# Altium PCB microPower1.PcbDoc
Units mil, origin at the board's own origin, x right, y up, seen from the top; angles counter-clockwise.
Board outline 1968.5 x 984.25 mil, 2 copper layers (Top Layer, Bottom Layer); 66 components, 48 nets, 240 pads, 41 vias.
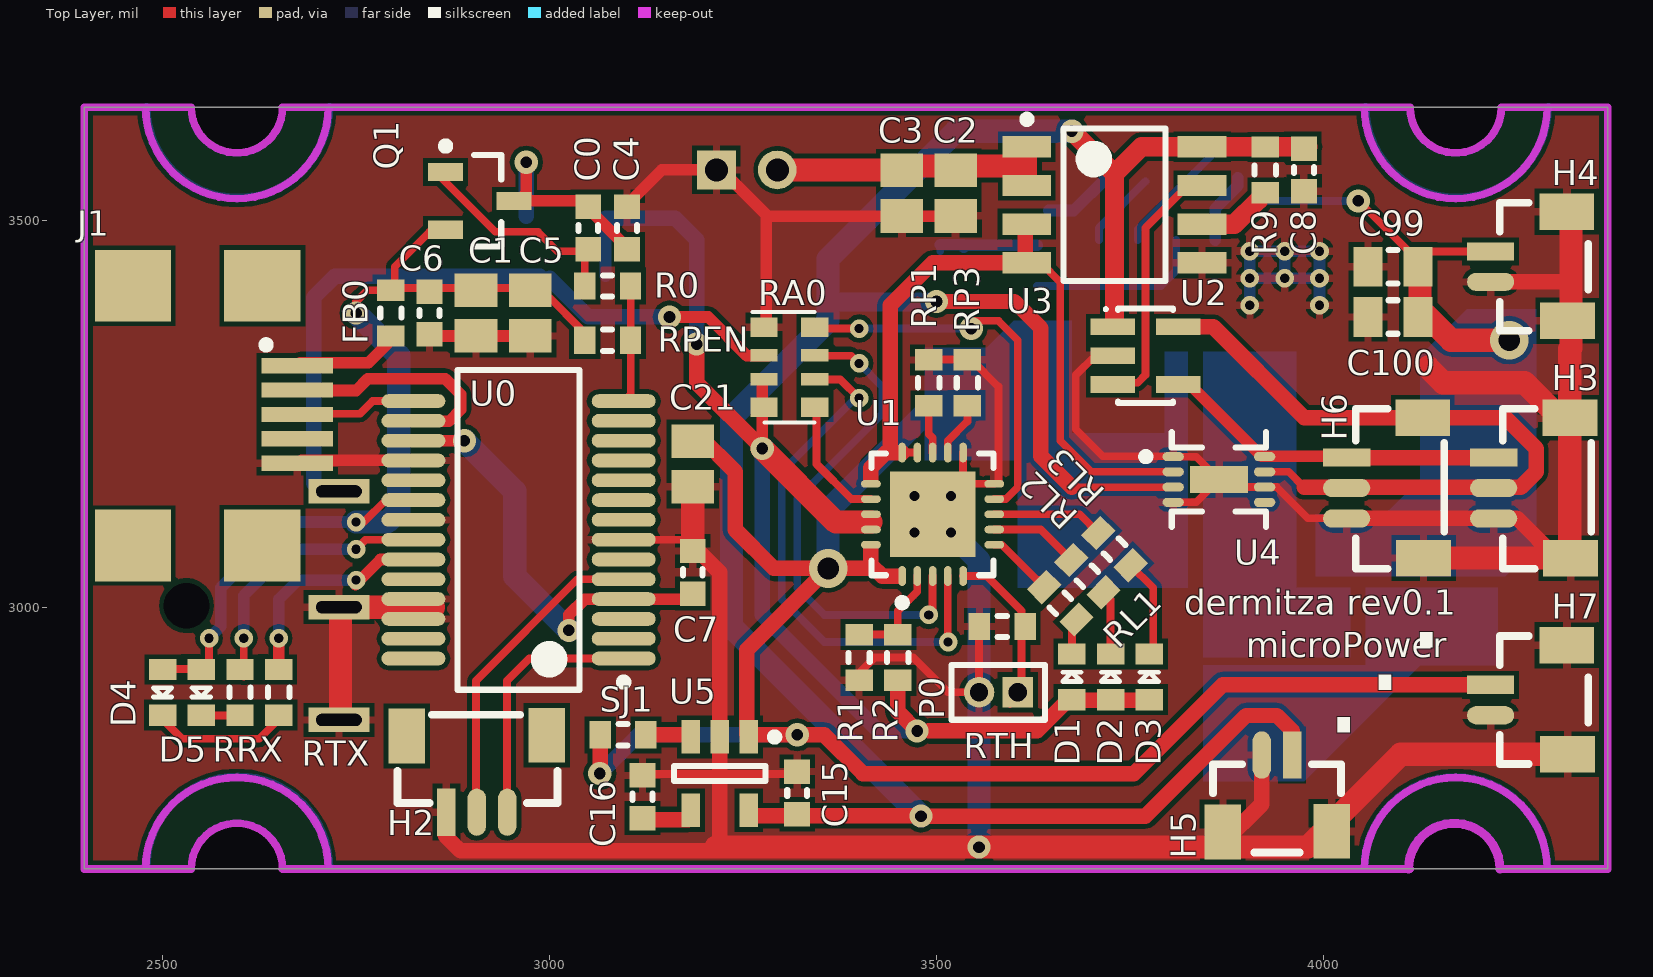
[diagram p0: Top Layer view]
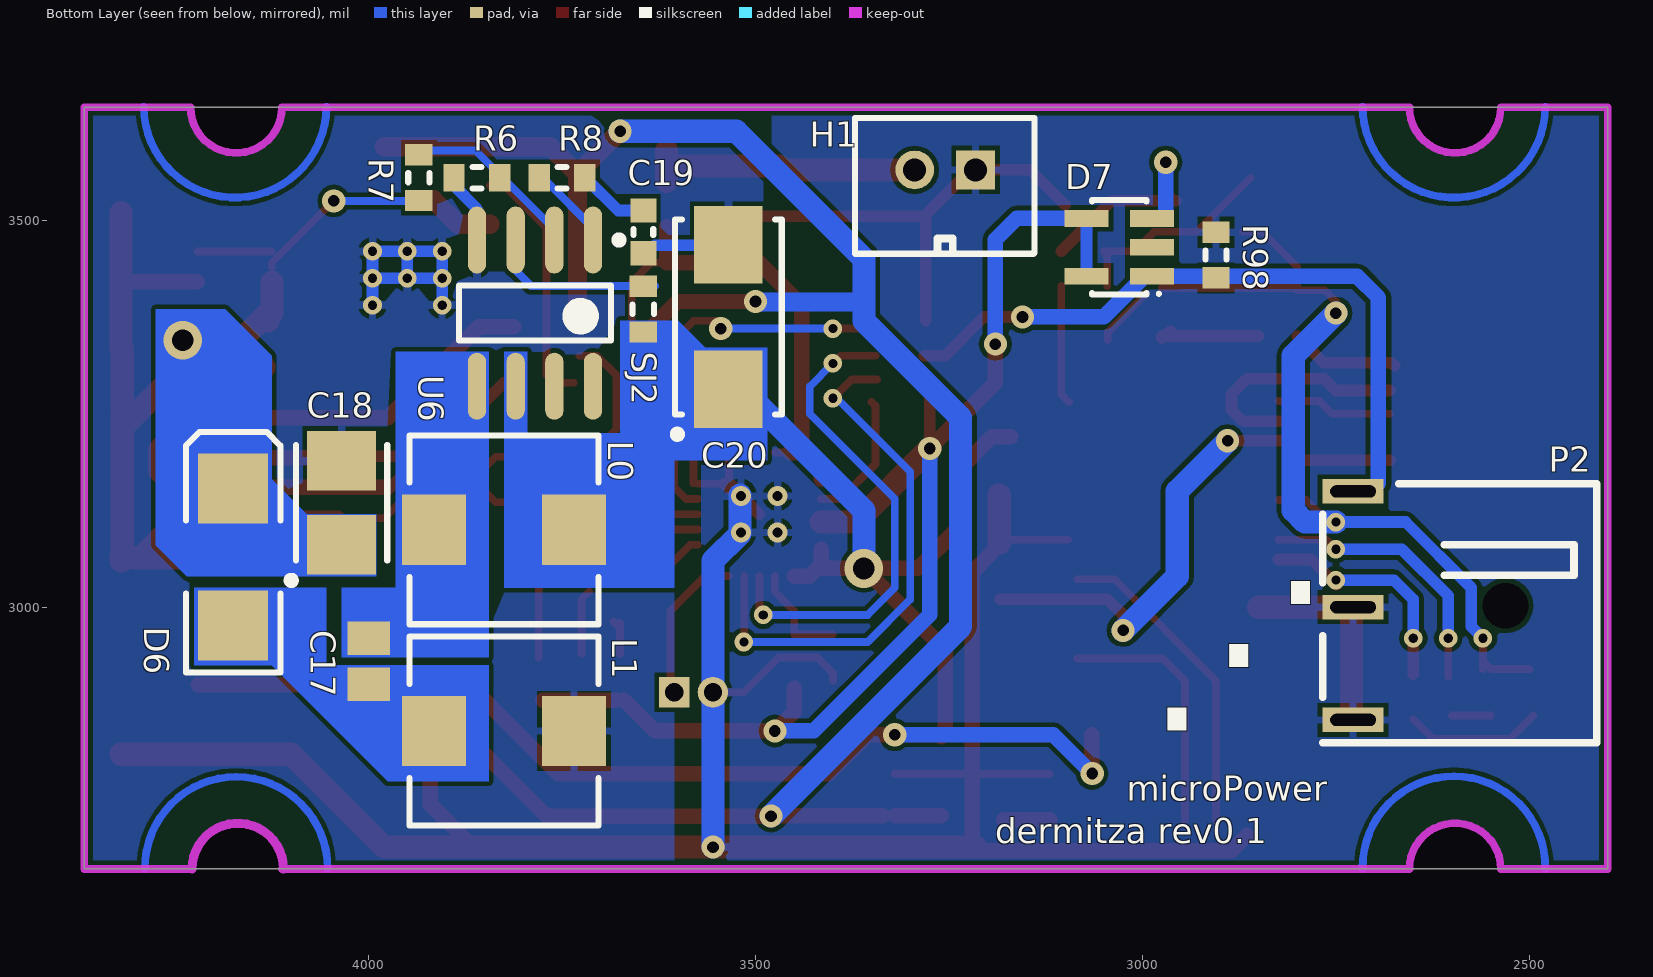
[diagram p1: Bottom Layer view, seen from below]

## Layer stack, top to bottom
Top Layer: signal copper 1.4
Dielectric: dielectric 12.6, FR-4, Dk 4.8
Bottom Layer: signal copper 1.4

## Board outline
2398.83,3646 2398.83,2661.75 4367.34,2661.75 4367.34,3646 2398.83,3646

## Design rules (kind name [scope] priority, off if disabled: settings)
Clearance [All] p1: gap=6
ComponentClearance ComponentClearance1 [OnLayer('Top Layer') vs OnLayer('Top Layer')] p1: gap=3 collisioncheckmode=3 verticalgap=2 showdistances=TRUE
HoleToHoleClearance [All] p1: gap=5 allowstackedmicrovias=TRUE
MinimumSolderMaskSliver [All] p1: minsoldermaskwidth=2
PlaneClearance [All] p1: clearance=100
PlaneConnect [All] p1: planeconnectstyle=Relief reliefexpansion=20 reliefentries=4 reliefconductorwidth=10 reliefairgap=15
PolygonConnect [All] p1: connectstyle=Relief reliefconductorwidth=10 reliefentries=4 polygonreliefangle="90 Angle"
RoutingVias [All] p1: holewidth=28 width=50 viastyle="Through Hole" minholewidth=10 minwidth=20 maxholewidth=28 maxwidth=50
SilkToSilkClearance [All] p1: silktosilkclearance=5
SilkscreenOverComponentPads [All] p1: minsilkscreentomaskgap=1
SolderMaskExpansion [All] p1: expansion=4
Width [All] p1: maxlimit=50 minlimit=10 preferedwidth=10 minimp=50.000000 maximp=50.000000 favimp=50.000000
21 further rules are at their usual default settings.

## Components (designator, comment, footprint, x,y, rotation, side; value= is the part's Value field where it differs from the comment)
C0 "0.1uF" 0603_CAP 3050,3490 r90 top
C1 "4.7uF" 0805_CAP 2905,3380 r270 top
C2 "4.7uF" 0805_CAP 3525,3535 r90 top
C3 "10uF" 0805_CAP 3455,3535 r90 top
C4 "0.1uF" 0603_CAP 3100,3490 r270 top
C5 "10uF" 0805_CAP 2975,3380 r270 top
C6 "0.01uF" 0603_CAP 2845,3380 r270 top
C7 "0.1uF" 0603_CAP 3185,3045 r270 top
C8 "0.1uF" 0603_CAP 3975,3565 r90 top
C15 "2.2uF" 0603_CAP 3320,2760 r90 top
C16 "470pF" 0603_CAP 3120,2755 r90 top
C17 "4.7uF" 0805_CAP 4000,2930 r270 bottom
C18 "220uF" CAPMP3528X21N 4035,3135 r90 bottom
C19 "680pF" 0603_CAP 3645,3485 r270 bottom
C20 "47uF" CAPMP6032X28N 3535,3375 r90 bottom
C21 "4.7uF" 0805_CAP 3185,3185 r270 top
C99 "CAP_0805" CAP_0805 4090,3440 r0 top
C100 "CAP_0805" CAP_0805 4090,3375 r0 top
D1 "" 0603_LED 3675,2910 r90 top
D2 "" 0603_LED 3725,2910 r90 top
D3 "" 0603_LED 3775,2910 r90 top
D4 "" 0603_LED 2500,2890 r270 top
D5 "" 0603_LED 2550,2890 r270 top
D6 "D Schottky" SMB 4175,3065 r90 bottom
D7 "RB496EA" SOT23-5 3030,3465 r90 bottom
FB0 "FB_SMD" 0603_IND 2795,3380 r90 top
H1 "JST2, through-hole" "JST B2B-PH-KL" 3255,3565 r0 bottom
H2 "RS232" "JST SHR-3V-S" 2905,2800 r0 top
H3 "I2C" "JST SHR-3V-S" 4285,3155 r270 top
H4 "V5" "JST SHR-2V-S" 4285,3440 r270 top
H5 "JST2, SMA" "JST SHR-2V-S" 3940,2740 r180 top
H6 "I2C" "JST SHR-3V-S" 4095,3155 r270 top
H7 "JST2, SMA" "JST SHR-2V-S" 4285,2880 r270 top
J1 "0481900001" 481900001 2525,3250 r180 top
L0 "10uH" INDP6060X45L 3825,3100 r0 bottom
L1 "10uH" INDP6060X45L 3825,2840 r180 bottom
P0 "MHDR1X2" MHDR1X2 3605,2890 r180 top
P2 "PJ-014D" PJ-014D 2590,3000 r270 bottom
Q1 "IRLML6402" Micro3_N 2910,3525 r0 top
R0 "1k" 0603_RES 3075,3415 r180 top
R1 "110k" 0603_RES 3400,2935 r90 top
R2 "330k" 0603_RES 3450,2935 r90 top
R6 "100K" 0603_RES 3860,3555 r180 bottom
R7 "309K" 0603_RES 3935,3555 r90 bottom
R8 "47K" 0603_RES 3750,3555 r180 bottom
R9 "10K" 0603_RES 3925,3565 r90 top
R98 "1M" 0603_RES 2905,3455 r90 bottom
RA0 "100k" RESCAXS80P320X150X60-8N 3310,3310 r270 top
RL1 "470R" 0603_RES 3660,3005 r135 top
RL2 "470R" 0603_RES 3695,3040 r135 top
RL3 "470R" 0603_RES 3730,3075 r135 top
RP1 "2K" 0603_RES 3490,3290 r90 top
RP3 "100K" 0603_RES 3540,3290 r90 top
RPEN "10k" 0603_RES 3075,3345 r0 top
RRX "270R" 0603_RES 2600,2890 r90 top
RTH "10K" 0603_RES 3585,2975 r0 top
RTX "270R" 0603_RES 2650,2890 r90 top
SJ1 "SJ" 0603_SJ 3095,2835 r0 top
SJ2 "SJ" 0603_SJ 3645,3385 r90 bottom
U0 "FT232R" SOP65P780X200-28N 2960,3100 r180 top
U1 "MCP73871-2CCI/ML" MCP73871-2CCI/ML 3495,3120 r90 top
U2 "MCP3021" SOT23-5 3770,3325 r270 top
U3 "ACS711" SOP127P600X175-8M 3730,3520 r0 top
U4 "MAX17043" QFN50P300X200X80-8N 3865,3165 r0 top
U5 "MIC5205-3.3BM5" SOT95P280X130-5N 3220,2785 r270 top
U6 "LT1308A" SOP127P600X175-8N 3785,3380 r270 bottom

## Footprints (in the part's own frame and the unit in brackets; to place one, negate y for a bottom-side part, rotate by r counter-clockwise, add the part's x,y. Pads: shape width x height; smd on the part's side, far side on the other; paste and mask are expansions set on the pad)
0603_CAP [mm] "Chip Capacitor, 2-Leads, Body 1.6x0.8mm, IPC High Density"
  rect 0.8x0.85 smd: 1(-0.7,0) 2(0.7,0)
  silkscreen extent -0.1,-0.33 0.1,0.33, body extent -0.88,-0.48 0.87,0.48, height 0.85
0603_IND [mm] "Chip Inductor, 2-Leads, Body 1.6x0.8mm, IPC High Density"
  rect 0.7x0.9 smd: 1(-0.75,0) 2(0.75,0)
  silkscreen extent -0.15,-0.35 0.15,0.35, body extent -0.85,-0.48 0.85,0.48, height 0.6
0603_LED [mm] "Chip LED, 2-Leads, Body 1.6x0.8mm, IPC High Density"
  rect 0.7x0.9 smd: 1(-0.75,0) 2(0.75,0)
  silkscreen extent -0.15,-0.3 0.15,0.3, body extent -0.85,-0.48 0.85,0.48, height 0.6
0603_RES [mm] "Chip Resistor, 2-Leads, Body 1.6x0.8mm, IPC High Density"
  rect 0.7x0.9 smd: 1(-0.75,0) 2(0.75,0)
  silkscreen extent -0.15,-0.35 0.15,0.35, body extent -0.85,-0.48 0.85,0.48, height 0.6
0603_SJ [mm] "Solder Joint, 2-Leads, Body 1.6x0.8mm, IPC High Density"
  rect 0.7x0.9 smd: 1(-0.75,0) 2(0.75,0)
  silkscreen extent -0.15,-0.35 0.15,0.35
0805_CAP [mm] "Chip Capacitor, 2-Leads, Body 2.0x1.3mm, IPC High Density"
  rect 1.1x1.4 smd: 1(-0.75,0) 2(0.75,0)
  body extent -1.1,-0.72 1.1,0.73, height 1.1
481900001 [mm] "Connector; USB Mini-B, Sinking Type, SM; 5 Position; Right Angle"
  rect 2.35x0.5 smd: 1(-3.787,-1.575) 2(-3.787,-0.775) 3(-3.787,0.025) 4(-3.787,0.825) 5(-3.787,1.625)
  rect 2.5x2.35 smd: MH1(-2.638,-4.2) MH2(1.613,-4.2) MH3(1.613,4.325) MH4(-2.638,4.325)
  silkscreen extent -2.89,-2.39 -2.64,-2.14, body extent -4.05,-3.81 4.55,3.89, height 4
CAP_0805 [mm] "CAP_0805"
  rect 0.95x1.3 smd: 1(-0.825,0) 2(0.825,0)
  silkscreen extent -0.15,-0.55 0.15,0.55, body extent -1.07,-0.7 1.07,0.7, height 0.65
CAPMP3528X21N [mm] "Molded Capacitor, 2-Leads, Body 3.5x2.8mm, IPC Medium Density"
  rect 1.95x2.25 smd: 1(-1.375,0) 2(1.375,0)
  silkscreen extent -2.67,-1.5 1.9,1.78, body extent -1.85,-1.5 1.85,1.5, height 2.1
CAPMP6032X28N [mm] "Molded Capacitor, 2-Leads, Body 6.0x3.2mm, IPC Medium Density"
  rect 2.55x2.25 smd: 1(-2.375,0) 2(2.375,0)
  silkscreen extent -3.97,-1.75 3.2,1.8, body extent -3.15,-1.75 3.15,1.75, height 2.8
INDP6060X45L [mm] "Precision Wire Wound Inductor, 2-Leads, Body 6.0x6.0mm, IPC High Density"
  rect 2.1x2.3 smd: 1(-2.3,0) 2(2.3,0)
  silkscreen extent -3.1,-3.1 3.1,3.1, body extent -3.1,-3.1 3.1,3.1, height 4.5
"JST B2B-PH-KL" [mm] "JST PH series, top entry, 2mm, 2A, Through-hole"
  rect 1.27x1.27 hole 0.75: 1(-1,0)
  round 1.27 hole 0.75: 2(1,0)
  silkscreen extent -2.93,-1.7 2.96,2.75, body extent -2.95,-1.7 2.95,2.75, height 6
"JST SHR-2V-S" [mm] "JST SH series, top entry, 1mm, 1A, SMT"
  rect 0.6x1.55 smd: 1(-0.5,-1.75)
  oval 0.6x1.55 smd: 2(0.5,-1.75)
  rect 1.2x1.8 smd: M1(-1.8,0.75) M2(1.775,0.775)
  silkscreen extent -2.1,-1.45 2.1,1.45, body extent -2.1,-1.45 2.1,1.45, height 6
"JST SHR-3V-S" [mm]
  rect 0.6x1.55 smd: 1(-0.975,-1.65)
  oval 0.6x1.55 smd: 2(0.025,-1.65) 3(1.025,-1.65)
  rect 1.2x1.8 smd: M1(-2.275,0.85) M2(2.325,0.875)
  silkscreen extent -2.58,-1.35 2.67,1.55
MCP73871-2CCI/ML [mm] "QFN, 20-Leads, Body 4.0x4.0mm (max), Pitch 0.50mm, IPC Medium Density"
  oval 0.65x0.25 smd: 1(-2.025,1) 2(-2.025,0.5) 3(-2.025,0) 4(-2.025,-0.5) 5(-2.025,-1) 11(2.025,-1) 12(2.025,-0.5) 13(2.025,0) 14(2.025,0.5) 15(2.025,1)
  oval 0.25x0.65 smd: 6(-1,-2.025) 7(-0.5,-2.025) 8(0,-2.025) 9(0.5,-2.025) 10(1,-2.025) 16(1,2.025) 17(0.5,2.025) 18(0,2.025) 19(-0.5,2.025) 20(-1,2.025)
  rect 2.8x2.8 smd: 21(0,0)
  silkscreen extent -3.02,-2 2,2, body extent -2,-2 2,2, height 1
MHDR1X2 [mm] "Connector; Header; 2 Position"
  rect 1x1 hole 0.6: 1(0,0)
  round 1 hole 0.6: 2(1.27,0)
  silkscreen extent -0.9,-0.9 2.17,0.9
Micro3_N [mm] "SOT23, 3-Leads, Body 2.9x1.3mm, Pitch 0.95mm, Lead Span 2.3mm, IPC Medium Density"
  rect 1.15x0.6 smd: 1(-1.125,0.95) 2(-1.125,-0.95) 3(1.125,0)
  silkscreen extent -1.25,-1.5 0.7,1.92, body extent -0.7,-1.5 0.7,1.5, height 1.12
PJ-014D [mm] "Power jack, 4.2mm OD, 1.3mm ID, through-hole"
  rect 0.8x2 hole 0.4 slot 1.5 at 90 deg: 1(-3.8,-3.5) 2(3.7,-3.5) 3(0,-3.5)
  round 0 hole 1.5: 4(-0.05,1.5)
  silkscreen extent -4.05,-4.5 4.45,4.5, body extent -4.05,-4.5 4.45,4.5, height 5.25
QFN50P300X200X80-8N [mm] "QFN, 8-Leads, Body 2.0x3.0mm (max), Pitch 0.50mm, IPC Medium Density"
  oval 0.7x0.3 smd: 1(-1.5,0.75) 2(-1.5,0.25) 3(-1.5,-0.25) 4(-1.5,-0.75) 5(1.5,-0.75) 6(1.5,-0.25) 7(1.5,0.25) 8(1.5,0.75)
  rect 1.9x0.9 smd: 9(0,0)
  silkscreen extent -2.52,-1.55 1.55,1.55, body extent -1.53,-1.02 1.53,1.03, height 0.8
RESCAXS80P320X150X60-8N [mm] "Resistor Network, 4 Way, 1206"
  rect 0.64x0.9 smd: 1(-1.315,-0.835) 4(1.315,-0.835) 5(1.315,0.835) 8(-1.315,0.835)
  rect 0.41x0.9 smd: 2(-0.4,-0.835) 3(0.4,-0.835) 6(0.4,0.835) 7(-0.4,0.835)
  silkscreen extent -1.82,-1.22 1.82,0.83, body extent -1.7,-0.8 1.7,0.8, height 0.5
SMB [mm] "DO-214-AA/SMB; 2 C-Bend Leads; Body 5.3 x 3.6 mm, inc. leads (LxW)"
  rect 2.3x2.3 smd: 1(-2.25,0) 2(2.25,0)
  silkscreen extent -3.8,-1.55 4.1,1.55
SOP65P780X200-28N [mm] "SOP, 28-Leads, Body 10.5x5.6mm (max), Pitch 0.65mm, IPC Medium Density"
  oval 2.1x0.45 smd: 1(-3.45,4.225) 2(-3.45,3.575) 3(-3.45,2.925) 4(-3.45,2.275) 5(-3.45,1.625) 6(-3.45,0.975) 7(-3.45,0.325) 8(-3.45,-0.325) 9(-3.45,-0.975) 10(-3.45,-1.625) 11(-3.45,-2.275) 12(-3.45,-2.925) 13(-3.45,-3.575) 14(-3.45,-4.225) 15(3.45,-4.225) 16(3.45,-3.575) 17(3.45,-2.925) 18(3.45,-2.275) 19(3.45,-1.625) 20(3.45,-0.975) 21(3.45,-0.325) 22(3.45,0.325) 23(3.45,0.975) 24(3.45,1.625) 25(3.45,2.275) 26(3.45,2.925) 27(3.45,3.575) 28(3.45,4.225)
  silkscreen extent -3.57,-5.25 2,5.25, body extent -2.8,-5.25 2.8,5.25, height 2
SOP127P600X175-8M [mm] "SOP, 8-Leads, Body 5.0x4.0mm (max), Pitch 1.27mm, IPC Low Density"
  rect 1.6x0.7 smd: 1(-2.875,1.905) 2(-2.875,0.635) 3(-2.875,-0.635) 4(-2.875,-1.905) 5(2.875,-1.905) 6(2.875,-0.635) 7(2.875,0.635) 8(2.875,1.905)
  silkscreen extent -3,-2.5 1.68,2.93, body extent -2,-2.5 2,2.5, height 1.75
SOP127P600X175-8N [mm] "SOP, 8-Leads, Body 5.0x4.0mm (max), Pitch 1.27mm, IPC Medium Density"
  oval 2.2x0.6 smd: 1(-2.4,1.905) 2(-2.4,0.635) 3(-2.4,-0.635) 4(-2.4,-1.905) 5(2.4,-1.905) 6(2.4,-0.635) 7(2.4,0.635) 8(2.4,1.905)
  silkscreen extent -2.52,-2.5 0.9,2.88, body extent -1.99,-2.5 1.99,2.5, height 1.75
SOT23-5 [mm] "SOT23-5"
  rect 0.55x1.45 smd: 1(-0.95,-1.075) 2(0,-1.075) 3(0.95,-1.075) 4(0.95,1.075) 5(-0.95,1.075)
  silkscreen extent -1.57,-1.35 1.55,0.9
SOT95P280X130-5N [mm] "SOT23, 5-Leads, Body 3.0x3.0mm (max), Pitch 0.95mm, IPC Medium Density"
  rect 1.1x0.6 smd: 1(-1.2,0.95) 2(-1.2,0) 3(-1.2,-0.95) 4(1.2,-0.95) 5(1.2,0.95)
  silkscreen extent -1.32,-1.5 0.25,1.93, body extent -0.87,-1.51 0.87,1.51, height 1.3

## Part data
C0 C4 C6 C7 C8 C15 C16 C19: library part CAP_0603, "CAP_0603"
C1 C2 C3 C5 C17 C21: library part CAP_SMD, "Chip Capacitor"
C18: library part T520B227M006ATE070, "CAP TANT 220UF 6.3V 20% 1411"
C20: library part TR3C476K016C0300, "CAP TANT 47UF 16V 10% 2312"
D1 D2 D3 D4 D5: library part LED_SMD
D6: "Schottky Diode"
D7: "Schottky barrier diode, 400mV @ 1A"
H2 H3 H6: library part JST3
H4: library part JST2
J1: "USB On-The-Go (OTG) Mini-B Receptacle, Right Angle, SMT, 0.80mm (.031\") Pitch, Solder Tabs with Back Cover, Recessed Type"
L0 L1: library part NR6045T100M, "INDUCTOR 10UH 3A 20% SMD"
P0: "Header, 2-Pin"
P2: "Power jack, 4.2mm OD, 1.3mm ID, through-hole"
Q1: library part IRLML6401, "HEXFET Power MOSFET"
R0 R1 R2 R6 R7 R8 R9 R98 RL1 RL2 RL3 RP1 RP3 RPEN RRX RTH RTX: library part RES_SMD
RA0: library part RES_ARR4, "Resistor array, 4-Way, SMD"
SJ1 SJ2: "Solder Joint"
U4: "Compact, Low-Cost 1S/2S Fuel Gauges with Low-Battery Alert"
U5: library part MIC5205, "Micrel MIC5205 LDO Voltage Regulator"
U6: library part LT1308, "High Current, Micropower Single Cell, 600kHz  DC/DC Converters"

## Free pads (board coordinates)
  round 0 hole 118.11: 0(2595,2660) 0(2595,3645) 0(4170,2660) 0(4170,3645)

## Via types
v1: diameter 24, hole 12, Top Layer to Bottom Layer, 19 vias
v2: diameter 30, hole 15, Top Layer to Bottom Layer, 16 vias
v3: diameter 25.98, hole 12.99, Top Layer to Bottom Layer, tented top, 4 vias
v4: diameter 50, hole 28, Top Layer to Bottom Layer, 2 vias

## Nets (pads, with @x,y where several pads share a name; then routed paths per layer and width w, separated by ;. In a path a pad name is that pad's centre, name@x,y a point inside that pad or via, vN(x,y) a via of type N, cw(c..) or ccw(c..) an arc to the next point about the centre after c; other vN are vias at no path point)
CE: RA0.5 U1.17 | length 171.1
  Top Layer w10: RA0.5@3350,3265 3345,3260 3345,3185 3390.31,3139.69 U1.17
D+: J1.3 U0.15 | length 150.9
  Top Layer w10: J1.3@2680,3250 2755,3250 2771.34,3266.34 U0.15
D-: J1.2 U0.16 | length 315.7
  Top Layer w15: J1.2@2680,3280 2750,3280 2765,3295 2865,3295 2885,3275 2885,3255 2870,3240 U0.16@2815,3240
EN3.3: SJ1.2 U5.3 | length 55.5
  Top Layer w20: SJ1.2 U5.3@3180,2835
GND: C1.2 C2.1 C3.1 C4.1 C5.2 C6.2 C7.1 C8.1 C15.2 C16.2 C18.2 C19.2 C20.2 C21.2 C99.1 C100.1 H1.1 H2.1 H3.3 H3.M1 H3.M2 H4.2 H4.M1 H4.M2 H5.2 H5.M1 H5.M2 H6.3 H6.M2 H7.2 H7.M1 H7.M2 J1.5 L1.2 P0.2 P2.2 P2.3 R1.1 R6.1 R98.2 RA0.1 RP1.2 RP3.2 RTH.1 U0.7 U0.18 U0.21 U0.25 U0.26 U1.10 U1.11 U1.21 U2.2 U3.5 U4.1 U4.4 U4.6 U4.9 U5.2 U6.4 | length 7117
  Top Layer w10: U0.7 3167.8,3087.2 ; C16.2@3120,2784.53 3220,2784.53 3319.53,2784.53 C15.2@3320,2785 ; R1.1@3400,2905 3400,2915 3420,2935 3470,2935 3515,2890 P0.2@3550,2890 ; RP1.2@3490,3320 3545,3320 3580,3285 U1.10@3580,3160 ; U1.21@3534.37,3160.63 U1.11 ; U1.21@3540.63,3159.37 U1.10 ; P0.2 RTH.1@3555,2975 ; U2.2 3705,3325 3680,3300 3680,3230 3715,3195 U4.1@3810,3195 ; U4.4 3835.47,3135.47 U4.9 3835.47,3194.53 U4.1 ; U4.9@3890,3155 3890.16,3155.16 U4.6 3939.84,3155.16 3980,3115 H6.3@4030,3115 ; H3.M2@4301.55,3063.45 4315.51,3063.45 4315.55,3063.85 4316.4,3071.99 H3.M2@4316.55,3073.45 ; 4318.46,3333.46 4320,3335 ; H3.M2@4316.55,3073.45 H3.M2@4318.45,3073.45 ; H3.M2@4316.55,3073.45 4315.51,3074.49 H3.M2 4320,3075 H3.M2@4318.46,3073.46 ; H3.M2@4316.55,3073.45 4318.46,3071.54 H3.M2@4318.46,3073.46
  Top Layer w15: J1.5@2680,3190 U0.18@2810,3190 ; P2.3@2722.8,2997.2 P2.3@2725.59,3000 ; C6.2@2850,3350.47 C5.2@2969.53,3350.47 ; C5.2@2970,3350 C5.2@2969.53,3350.47 ; C5.2@2975,3347.52 2963.46,3356.54 C5.2@2969.53,3350.47 ; C5.2@2975,3350 2974.53,3350.47 C5.2@2969.53,3350.47 ; C4.1@3100,3520 3145,3565 H1.1 H1.1@3220,3565 ; H1.1@3225,3562.13 3282.13,3505 C2.1@3520,3505 ; RA0.1@3280,3370 3280,3503.23 ; U1.21@3534.37,3160.63 U1.21 U1.21@3540.63,3159.37
  Top Layer w20: H2.1@2865,2705 2885,2685 3250,2685 ; C7.1@3196.54,3068.46 3220,3045 3220,2784.53 3220,2690 ; H5.M2@3870,2695 3920.32,2745.32 H5.2 ; H6.3@4039.69,3115 4250,3115 H3.M2@4301.55,3063.45 ; H4.2@4221.1,3420.32 4319.69,3420.32
  Top Layer w30: P2.3@2725.59,3000 2850,3000 ; P2.2@2730,2855 P2.3@2730,2997.87 ; C7.1@3185,3082.4 C21.2@3185,3145 ; 3215,2690 3980,2690 4100,2810 H7.M2@4320,2810 ; H6.M2 H3.M2@4301.55,3063.45 ; 4135,3310 4155,3290 4260,3290 H3.M1@4315,3235 ; H3.M2@4315.51,3063.45 4318.45,3063.45 H3.M2@4320,3065 ; H3.M2@4318.46,3073.46 H3.M1 ; H3.M1@4318.46,3254.57 4318.46,3333.46 ; H3.M2@4319.53,3059.53 H3.M2@4320,3060 ; 4320,3335 H4.M1@4320,3510
  Bottom Layer w10: C20.2@3505,3460 C20.2@3505,3468.5
  Bottom Layer w15: C20.2@3505,3468.5 C20.2 ; C20.2@3535,3465 3537.44,3467.44 C19.2@3630,3467.44 ; U6.4 3860,3515 3889.53,3544.53 R6.1 ; v1(3905,3390) v1(3905,3425) ; v1(3995,3390) v1(3995,3425) ; v1(3905,3425) v1(3950,3425) ; v1(3905,3425) v1(3905,3460) v1(3950,3460) ; v1(3950,3425) v1(3995,3425) ; v1(3950,3425) v1(3950,3460) ; v1(3950,3460) v1(3995,3460) v1(3995,3425)
  Bottom Layer w30: v3@3520,3145 3520,3095 3555,3060 v2(3555,2690)
  other v3: 3471.38,3096.38 3518.62,3096.38 3471.38,3143.62 3518.62,3143.62
NetC0_1: C0.1 Q1.1 R0.2 | length 276.4
  Top Layer w10: Q1.1@2860,3555 2930,3485 2985,3485 3010,3460 C0.1@3050,3460 ; R0.2 3045.47,3454.53 C0.1@3050,3460.47
NetC7_2: C7.2 U0.4 U0.17 | length 565.2
  Top Layer w10: U0.4@3083.66,3010 U0.4@3084.09,3010.43
  Top Layer w15: U0.17@2812.44,3215.16 U0.17 v2@2888.11,3215.16 ; v2(3025,2970) 3025,2990 3045.43,3010.43 3084.09,3010.43 U0.4 C7.2@3184.57,3010.43
  Bottom Layer w30: v2(2890,3215) 2955,3150 2955,3040 v2(3025,2970)
NetC16_1: C16.1 U5.4 | length 59.5
  Top Layer w20: C16.1@3120,2725.47 U5.4@3179.53,2725.47
NetC17_1: C17.1 L0.2 U6.5
NetC17_2: C17.2 D6.1 L1.1
NetC19_1: C19.1 R8.2 | length 92.6
  Bottom Layer w15: C19.1 3677.56,3512.56 R8.2@3720,3555
NetD1_2: D1.2 RL1.1 | length 45.7
  Top Layer w10: D1.2 RL1.1@3675,2980 ; RL1.1@3680,2977.67 RL1.1@3683.66,2981.34
NetD2_2: D2.2 RL2.1 | length 84.1
  Top Layer w10: RL2.1@3715,3020 3725,3010 D2.2@3725,2940
NetD3_2: D3.2 RL3.1 | length 132.4
  Top Layer w10: RL3.1@3750,3055 3780,3025 D3.2@3780,2935
NetD4_2: D4.2 RTX.1 | length 177.8
  Top Layer w10: D4.2@2495,2860 2525,2830 2625,2830 RTX.1@2650,2855
NetD5_2: D5.2 RRX.1 | length 50
  Top Layer w10: D5.2@2550,2860 RRX.1@2600,2860
NetFB0_1: FB0.1 J1.1 | length 141.6
  Top Layer w15: J1.1 2678.09,3316 2766,3316 FB0.1@2800,3350
NetP0_1: P0.1 RTH.2 U1.5 | length 220.6
  Top Layer w10: U1.5 3564.72,3040.28 3610,2995 3610,2890 P0.1@3595,2875
NetR1_2: R1.2 R2.2 U1.2 | length 135.3
  Top Layer w10: R1.2@3400.47,2964.53 R2.2 ; R2.2@3450,2965 3450,2994.95 3470.28,3015.23 ; 3470.28,3015.28 3475.32,3020.32 U1.2
NetR6_2: R6.2 R7.2 U6.2 | length 225.9
  Bottom Layer w10: U6.2 3760,3488.24 3861.76,3590 R7.2@3930,3590
NetR8_1: R8.1 U6.1 | length 100.4
  Bottom Layer w10: U6.1 3710,3490 R8.1@3770,3550
NetR9_1: R9.1 U3.6 | length 86.4
  Top Layer w25: U3.6 3885,3495 R9.1@3916.54,3526.54
NetRL1_2: RL1.2 U1.6 | length 87.1
  Top Layer w10: U1.6 3584.37,3080.63 3629.6,3035.4 RL1.2@3643.07,3035.4
NetRL2_2: RL2.2 U1.7 | length 114.7
  Top Layer w10: U1.7 3634.68,3100.32 3666.34,3068.66 RL2.2@3676.34,3068.66
NetRL3_2: RL3.2 U1.8 | length 145.6
  Top Layer w10: U1.8 3685,3120 RL3.2@3710,3095
NetRP1_1: RP1.1 U1.13 | length 60.5
  Top Layer w10: RP1.1@3485,3256.54 3490,3251.54 3490,3223.79 3495.23,3218.56 3495.23,3209.87 U1.13@3495,3209.65 ; U1.13 U1.13@3495,3209.02
NetRP3_1: RP3.1 U1.12 | length 70.8
  Top Layer w10: U1.12 3514.69,3214.69 3540,3240 RP3.1@3540,3260
NetRRX_2: RRX.2 U0.22 | length 358.2
  Top Layer w10: RRX.2@2605,2910 2605,2955 v1@2610,2960 ; v1(2750,3075) 2762.2,3087.2 U0.22
  Bottom Layer w10: v1@2605,2965 v1@2610,2960
  Bottom Layer w15: v1@2605,2965 2605,3015 2665,3075 v1(2750,3075)
  other v1: 2605,2960
NetRTX_2: RTX.2 U0.23 | length 295.2
  Top Layer w15: RTX.2@2650,2913.46 v1(2650,2960) ; v1@2749.25,3029.25 2781.61,3061.61 U0.23
  Bottom Layer w15: v1(2650,2960) 2650,3010 2675,3035 v1(2750,3035)
NetSJ2_2: SJ2.2 U6.3 | length 227.8
  Bottom Layer w10: SJ2.2@3630,3415 3790,3415 3810,3435 U6.3
NetU2_3: U2.3 U3.7 | length 325.1
  Top Layer w10: U2.3@3735,3290 3760,3290 3770,3300 3770,3490 3825,3545 U3.7
PROG2: RA0.6 U1.4 | length 694.6
  Top Layer w10: RA0.6 3375.75,3294.25 v1(3400,3270) ; v1@3514.69,2955 U1.4
  Bottom Layer w10: v1(3400,3270) 3395,3270 3300,3175 3300,3010 3355,2955 v1(3515,2955)
PWREN#: R0.1 RPEN.2 U0.14 | length 154.1
  Top Layer w10: U0.14@3095,3265 3105,3275 R0.1@3105,3415
RXD: H2.2 U0.5 | length 413.3
  Top Layer w10: H2.2@2905,2725.04 2905,2905 3036.02,3036.02 U0.5@3084.09,3036.02
SCL: H3.2 H6.2 H6.M1 U2.5 U4.7 | length 916.5
  Top Layer w10: U4.7@3920,3175 3955,3175 3975,3155 ; H6.M1@4125,3245 H6.M1@4130,3240
  Top Layer w20: U2.5 3857.6,3362.4 3975,3245 H6.M1@4125,3245 ; 3975,3155 H3.2@4210,3155 ; H6.M1@4130,3245 4235,3245 4275,3205 4275,3175 4255,3155 H3.2@4225,3155
SDA: H3.1 H6.1 U2.4 U4.8 | length 455.7
  Top Layer w10: H3.1@4218.39,3193.39 H3.1@4220,3195
  Top Layer w15: U2.4@3805,3290 3825,3290 3920,3195 4028.43,3195 H6.1
  Top Layer w20: H6.1 H3.1@4218.39,3193.39
SEL: RA0.7 U1.3 | length 644
  Top Layer w10: RA0.7@3345,3325 3390,3325 v1(3400,3315) ; v1(3490,2990) 3495,2995 U1.3
  Bottom Layer w10: v1(3400,3315) 3430,3285 3430,3250 3320,3140 3320,3025 3355,2990 v1(3490,2990)
TE: RA0.8 U1.9 | length 496.3
  Top Layer w10: RA0.8@3345,3360 v1(3400,3360) ; v2@3545.63,3370 3580,3370 3605,3345 3605,3155 3589.69,3139.69 U1.9
  Bottom Layer w10: v1(3400,3360) v2(3545,3360)
TXD: H2.3 U0.1 | length 330.9
  Top Layer w10: H2.3@2945,2725.04 2945,2905 2973.66,2933.66 U0.1@3084.09,2933.66
V3.3: C8.2 C15.1 H5.1 R9.2 U2.1 U3.8 U4.3 U5.5 | length 3227.5
  Top Layer w10: 3675,3155 U4.3@3810,3155
  Top Layer w20: U5.5@3260,2730.47 C15.1@3320,2730.47 ; C15.1@3335,2730.47 v2@3480,2730.47 ; v2(3480,2730) 3770,2730 3900,2860 3940,2860 3960,2840 H5.1@3960,2800 ; v2(3500,3395) 3600.63,3395 3635,3360.63 3635,3195 3675,3155
  Top Layer w25: v2(3675,3615) 3730,3560 ; U2.1@3730,3365 3730,3560 ; C8.2@3980,3595 3855,3595 U3.8 3765,3595 3730,3560
  Bottom Layer w25: 3360,3394.37 v2@3500,3394.37
  Bottom Layer w30: v2(3480,2730) 3235,2975 3235,3245 3360,3370 3360,3394.37 3360,3450 3525,3615 v2(3675,3615)
V5: C18.1 C99.2 C100.2 D6.2 H4.1 R7.1 | length 518.6
  Top Layer w10: v2(4045,3525) 4125,3445 C99.2@4125,3440 ; C99.2@4125,3420 4125.31,3419.68 C99.2@4130,3419.68 ; C99.2@4125,3459.68 H4.1@4221.1,3459.68 ; C100.2@4130,3365 C100.2@4130,3370
  Top Layer w30: C100.2@4125,3380.32 C99.2@4125,3420 ; C100.2@4130,3370 4130,3380 4165,3345 v4(4240,3345)
  Bottom Layer w10: R7.1@3925,3525 v2(4045,3525)
VBAT: U1.14 U1.15 U1.16 U3.3 U3.4 U4.2 | length 961.2
  Top Layer w10: 3440,3199.72 U1.14 ; U3.4 3635,3445 3660,3420 3660,3215 3700,3175 U4.2@3810,3175
  Top Layer w20: 3415,3165 3415,3180 3434.72,3199.72 U1.15 ; 3440,3199.72 3440,3390 3495,3445 3610,3445 U3.4@3615,3450 ; U3.4@3615,3445 U3.4@3615,3450 ; U3.3@3615,3491.81 U3.4@3615,3450
VBAT_IN: C2.2 C3.2 H1.2 U3.1 U3.2 | length 362.1
  Top Layer w30: H1.2@3295,3565 3465,3565 3470,3570 3615,3570 ; U3.2@3615,3550 3615,3570 ; U3.1@3615,3590 3615,3570
VIN: D1.1 D2.1 D3.1 D7.4 D7.5 R2.1 RA0.3 RA0.4 U1.18 U1.19 | length 1622.3
  Top Layer w10: U1.19 3415.28,3110 U1.18
  Top Layer w15: v2(3275,3205) RA0.3@3275,3290
  Top Layer w20: v2(3190,3340) 3190,3290 v2(3275,3205) ; R2.1@3450,2895 3450,2865 v2(3475,2840) ; 3490,2840 3630,2840 D1.1@3670,2880 ; D1.1@3680,2880 D3.1@3775,2880
  Top Layer w30: v2(3275,3205) 3370,3110 3415.28,3110
  Bottom Layer w15: D7.5 D7.4@3072.32,3502.32
  Bottom Layer w20: D7.4@3072.32,3502.32 3162.68,3502.32 3190,3475 v2(3190,3340) ; v2@3275,3200 3275,2990 3425,2840 v2(3475,2840)
VOUT: C20.1 C21.1 H7.1 L0.1 SJ1.1 SJ2.1 U1.1 U1.20 U5.1 U6.6 | length 2476.8
  Top Layer w20: v2@3065.47,2785 SJ1.1 ; C21.1@3170,3220 3195,3220 3240,3175 3240,3100 3290,3050 v4(3360,3050) ; U5.1@3255,2835 3255,2945 v4(3360,3050) ; U5.1@3260,2832.24 3260,2835 v2(3320,2835) 3355,2835 3405,2785 3755,2785 3870,2900 H7.1@4220,2900 ; 3415.28,3075 3415.28,3054.72 ; 3450,3040 3430,3040 3415.28,3054.72 ; v4(3360,3050) 3410.55,3050 3415.28,3054.72
  Bottom Layer w20: v2(3065,2785) 3115,2835 v2(3320,2835) ; C20.1@3530,3285 3600,3355 SJ2.1@3630,3355
  Bottom Layer w30: v4(3360,3050) 3360,3125 3516.5,3281.5 C20.1@3530,3281.5
VS: C0.2 C4.2 D7.3 Q1.3 | length 296.3
  Top Layer w15: Q1.3@2956.26,3525 3040,3525 C4.2@3105,3460 ; Q1.3@2962.5,3527.5 2970,3535 v2(2970,3575)
  Bottom Layer w20: D7.3@2970,3505 v2(2970,3575)
VUSB: C1.1 C5.1 C6.1 D4.1 D5.1 FB0.2 Q1.2 RPEN.1 U0.20 | length 1252.4
  Top Layer w10: D4.1@2500,2920 2550,2920 D5.1@2560,2930 ; D5.1@2560,2920 v1(2560,2960) ; v2(2750,3380) 2750,3395 2764.53,3409.53 FB0.2@2800,3409.53 ; v1@2755,3110 2760,3110 2788.39,3138.39 U0.20 ; Q1.2@2870,3485 2845,3485 2800,3440 2800,3410 2802.48,3412.48 C5.1@2975,3412.48 ; C5.1@2995,3405.47 2995,3405 3045,3355 RPEN.1@3045,3345
  Bottom Layer w15: v1(2560,2960) 2575,2975 2575,3025 2660,3110 v1(2750,3110)
  Bottom Layer w30: v1(2750,3110) 2790,3110 2805,3125 2805,3325 v2(2750,3380)
VW: D7.1 P2.1 R98.1 RA0.2 | length 889
  Top Layer w15: v2(3155,3375) 3205,3375 3255,3325 RA0.2@3282.13,3325
  Bottom Layer w20: P2.1@2710,3145 2695,3160 2695,3400 2722.6,3427.6 ; 2722.5,3427.5 2722.6,3427.6 ; D7.1 2722.6,3427.6 ; D7.1@3000,3425 3050,3375 v2(3155,3375)
pads on no net: D7.2 H2.M1 H2.M2 J1.4 J1.MH1 J1.MH2 J1.MH3 J1.MH4 P2.4 U0.2 U0.3 U0.6 U0.8 U0.9 U0.10 U0.11 U0.12 U0.13 U0.19 U0.24 U0.27 U0.28 U4.5 U6.7 U6.8
copper on no net: | length 1483.9
  Bottom Layer w10: 2479.4,2662.18 cw(c2597.5,2663.47) 2715.6,2662.18 ; 2479.39,3646.33 ccw(c2597.5,3647.33) 2715.61,3646.33 ; 4052.89,2661.97 cw(c4171,2662.63) 4289.11,2661.97 ; 4054.4,3646.37 ccw(c4172.5,3647.49) 4290.6,3646.37

## Polygon pours and split planes (outlines as drawn)
GND on Bottom Layer "GND1" (solid, remove dead copper, pour order 10): 3605,3005 3605,2660 4370,2660 4370,3645 3490,3645 3490,3305 3605,3190 3605,2660
GND on Bottom Layer "GND2" (solid, remove dead copper, pour order 5): 3570,2660 3570,3330 3499.09,3330 3483.9,3330 3478.83,3330 3478.83,3645 2400,3645 2400,2660 3570,2660
GND on Top Layer "GNDTOP" (solid, remove dead copper, pour order 15): 2400,3645 4370,3645 4370,2660 2400,2660 2400,3645

## Keep-outs
Top Layer:
  lines w10: 2477.89,2661.75 cw(c2596,2661.75) 2714.11,2661.75 ; 2477.89,3646 ccw(c2596,3646) 2714.11,3646 ; 4052.89,2661.75 cw(c4171,2661.75) 4289.11,2661.75 ; 4052.89,3646 ccw(c4171,3646) 4289.11,3646
Keep-Out Layer:
  lines w10: 4111.94,2661.75 2655.06,2661.75 ccw(c2596,2661.75) 2536.94,2661.75 2398.83,2661.75 2398.83,3646 2536.94,3646 ccw(c2596,3646) 2655.06,3646 4111.94,3646 ccw(c4171,3646) 4230.05,3646 4367.34,3646 4367.34,2661.75 4230.06,2661.75
  lines w11.81: 4110,2661.75 cw(c4169.06,2661.75) 4228.11,2661.75

## Other copper
Bottom Layer:
  region net VOUT: 3485,3335 3485,3190 3605,3190 3605,3025 3825,3025 3825,3330 3795,3330 3795,3225 3675,3225 3675,3370 3600,3370 3565,3335
  region net NetC17_2: 4225,3025 4225,2925 4125,2925 3975,2775 3845,2775 3845,2925 4055,2925 4055,3025
  region net NetC17_1: 3965,3330 3845,3330 3845,2935 4035,2935 4035,3025 3965,3025
  region net V5: 4275,3385 4275,3080 4235,3040 3990,3040 3990,3120 4080,3120 4125,3165 4125,3325 4185,3385

## Silkscreen, mask and mechanical layers (free items; w line width, h text height)
Top Overlay:
  text "dermitza rev0.1" at 3820,2990 h32
  text "microPower" at 3900,2935 h32
  text "⋰" at 4000,2815 h200
Bottom Overlay:
  text "⋰" at 2995,2805 h300
  text "microPower" at 3020,2750 h32
  text "dermitza rev0.1" at 3190,2695 h32

## Dimensions
2398.83,3646 to 4367.34,3646 on Top Overlay
2536.94,2661.75 to 2398.83,3646 on Top Overlay